# Altium PCB OpenDriver.PcbDoc (part 2 of 2)
Units mil, origin at the board's own origin, x right, y up, seen from the top; angles counter-clockwise.
Board outline 3900 x 2100 mil, 2 copper layers (Top Layer, Bottom Layer); 70 components, 50 nets, 317 pads, 234 vias.
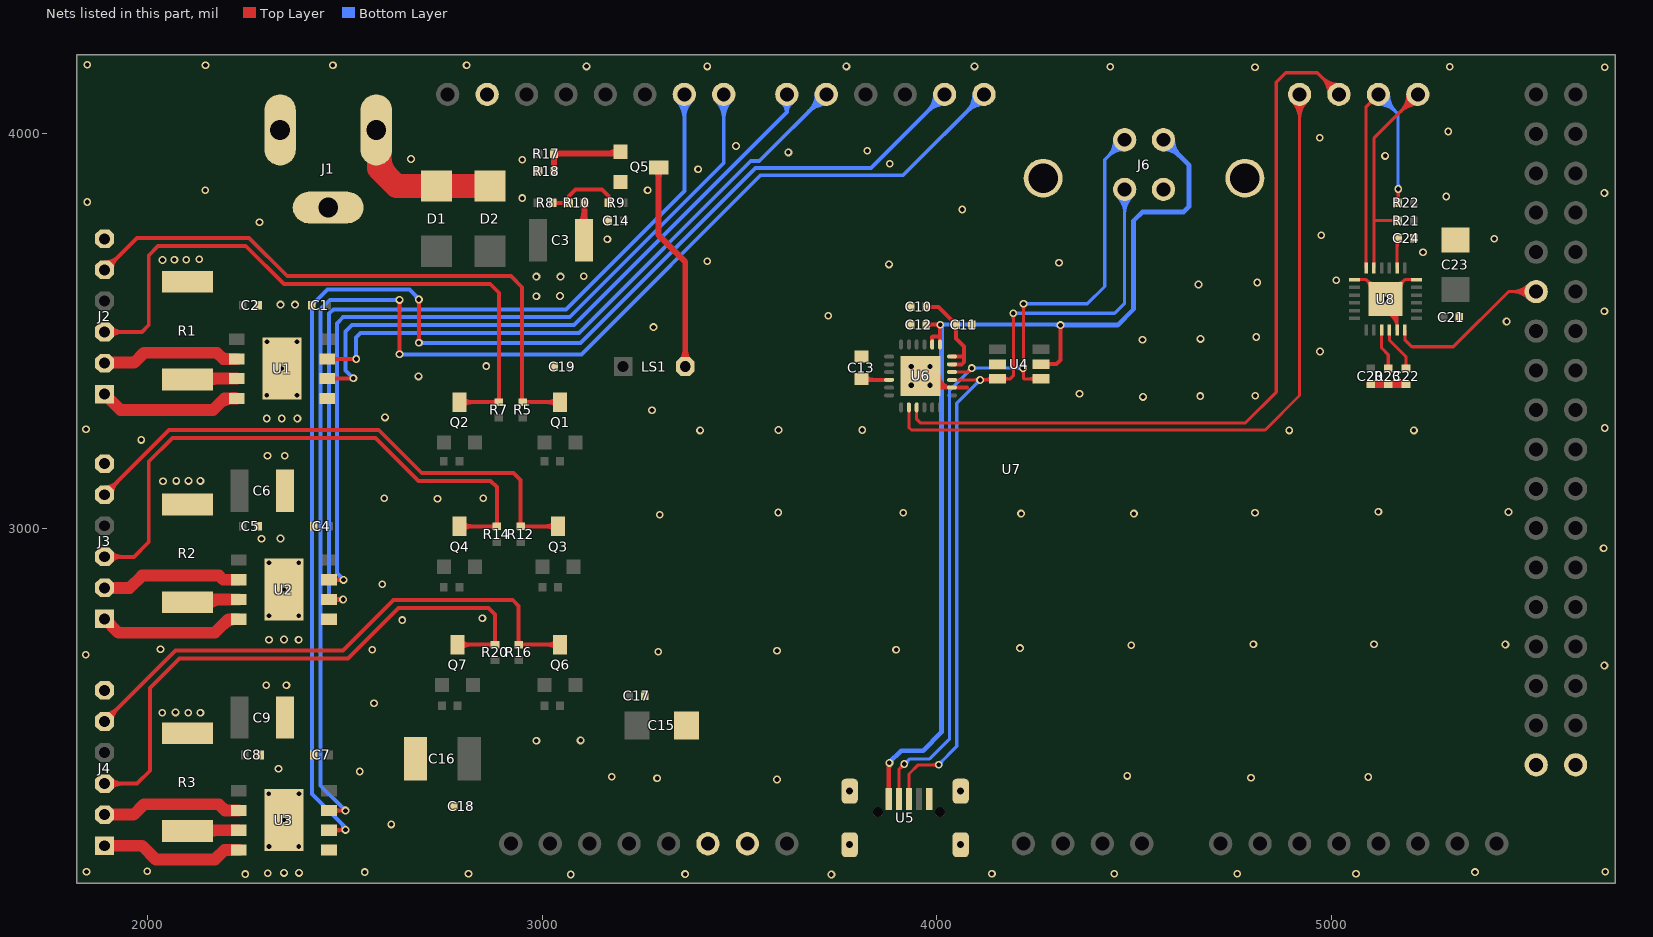
[diagram p2: the nets of this part, all layers, seen from the top]

## Via types
v1: diameter 19.68, hole 11.81, Top Layer to Bottom Layer, tented both sides, 224 vias
v2: diameter 25.98, hole 12.99, Top Layer to Bottom Layer, tented both sides, 4 vias
v3: diameter 20, hole 10, Top Layer to Bottom Layer, 3 vias
v4: diameter 31.5, hole 19.68, Top Layer to Bottom Layer, tented both sides, 3 vias

## Nets (pads, with @x,y where several pads share a name; then routed paths per layer and width w, separated by ;. In a path a pad name is that pad's centre, name@x,y a point inside that pad or via, vN(x,y) a via of type N, cw(c..) or ccw(c..) an arc to the next point about the centre after c; other vN are vias at no path point) (continued)
GND: C1.1 C2.1 C3.1 C4.1 C5.1 C6.1 C7.1 C8.1 C9.1 C10.1 C11.1 C12.1 C13.2 C14.1 C15.2 C16.2 C17.1 C18.1 C19.1 C20.1 C21.1 C22.2 C23.2 C24.2 J1.2 J1.3 J2.6 J3.6 J4.6 J6.4 J6.5 J6.6 Q5.1 R1.1 R2.1 R3.1 R10.2 R18.2 R23.1 U1.1 U1.9 U2.1 U2.9 U3.1 U3.9 U4.2 U5.5 U5.6 U5.7 U5.8 U5.9 U6.2 U6.25 U7.6 U7.7 U7.47 U7.85 U7.86 U8.1@5059.25,3630.32 U8.11 U8.18 U8.25 | length 1942.9
  Top Layer w8: U8.1@5059.25,3630.32 5088.78,3630.32 ; U8.25@5131.81,3550.41 cw(c5123.01,3506.78) U8.11@5167.52,3506.78 ; U8.25@5133.39,3558.25 cw(c5124.98,3516.56) 5167.52,3516.56 ; U8.25@5134.97,3566.1 cw(c5126.95,3526.33) 5167.52,3526.33 ; U8.25@5136.55,3573.94 cw(c5128.92,3536.1) 5167.52,3536.1 ; U8.25@5138.13,3581.78 cw(c5130.89,3545.88) U8.25@5167.52,3545.88 ; U8.11@5167.52,3502.36 5167.52,3551.57 v1(5137.99,3581.1) ; U8.18@5216.73,3630.32 5187.2,3630.32 ; 5088.78,3630.31 ccw(c5118.45,3659.98) 5128.54,3619.26 cw(c5118.45,3659.98) 5088.78,3630.31 ; 5088.78,3630.31 cw(c5059.11,3600.65) 5099.84,3590.56 ccw(c5059.11,3600.65) 5088.78,3630.31 ; 5088.78,3630.32 v1(5137.99,3581.1) ; U8.25@5098.8,3620.3 ccw(c5122.43,3643.93) 5130.46,3611.49 cw(c5122.43,3643.93) U8.25@5098.8,3620.3 ; U8.25@5098.8,3620.3 cw(c5075.17,3596.67) 5107.6,3588.63 ccw(c5075.17,3596.67) U8.25@5098.8,3620.3 ; U8.25@5128.02,3591.08 ccw(c5137.99,3601.05) U8.25@5137.99,3586.94 ; U8.25@5128.02,3591.08 cw(c5118.04,3581.1) 5132.15,3581.1 ccw(c5118.04,3581.1) U8.25@5128.02,3591.08 ; U8.25@5128.02,3591.08 ccw(c5137.99,3601.05) U8.25@5137.99,3586.94 ; v1(5137.99,3581.1) 5187.2,3630.32 ; U8.25@5137.99,3586.94 ccw(c5137.99,3601.05) U8.25@5147.97,3591.08 ; U8.25@5137.99,3586.94 ccw(c5137.99,3601.05) U8.25@5147.97,3591.08 ; U8.25@5143.83,3581.1 ccw(c5157.94,3581.1) U8.25@5147.97,3571.13 ; U8.25@5143.83,3581.1 cw(c5157.94,3581.1) U8.25@5147.97,3591.08 ; U8.25@5143.83,3581.1 ccw(c5157.94,3581.1) U8.25@5147.97,3571.13 ; U8.25@5143.83,3581.1 cw(c5157.94,3581.1) U8.25@5147.97,3591.08 ; U8.25@5147.97,3571.13 ccw(c5137.99,3561.15) 5137.99,3575.26 cw(c5137.99,3561.15) U8.25@5147.97,3571.13 ; U8.25@5177.19,3620.3 ccw(c5200.82,3596.67) 5168.38,3588.63 cw(c5200.82,3596.67) U8.25@5177.19,3620.3 ; U8.25@5177.19,3620.3 cw(c5153.56,3643.93) 5145.52,3611.49 ccw(c5153.56,3643.93) U8.25@5177.19,3620.3 ; 5187.2,3630.31 ccw(c5216.87,3600.65) 5176.15,3590.56 cw(c5216.87,3600.65) 5187.2,3630.31 ; 5187.2,3630.31 cw(c5157.54,3659.98) 5147.45,3619.26 ccw(c5157.54,3659.98) 5187.2,3630.31
  Top Layer w9: U6.25@3969.67,3386.48 ccw(c4001.06,3387.9) U6.25@4001.06,3356.47 ; U6.25@3978.66,3386.89 ccw(c4010.48,3388.32) 4010.48,3356.47 ; U6.25@3982.26,3362.02 ccw(c3995.65,3375.41) U6.25@3995.65,3356.47 ; U6.25@3987.65,3387.29 ccw(c4019.89,3388.75) 4019.89,3356.47 ; U6.25@3988.53,3356.47 U6.2@4038.72,3356.47 cw(c4038.72,3389.6) U6.25@4005.63,3388.1 ; U6.25@3988.63,3368.38 ccw(c4017.38,3397.14) 4017.38,3356.47 ; U6.25@3996.64,3387.7 ccw(c4029.31,3389.17) U6.2@4029.31,3356.47
  Top Layer w10: U6.2@4038.72,3356.47 4076.47,3356.47
  Top Layer w15: C3.1@3094.23,3771.55 ccw(c3064.15,3801.63) 3106.68,3801.63 ; C3.1@3106.68,3731.61 R10.2@3106.68,3825 ; 3106.68,3793.83 ccw(c3138.2,3793.83) C3.1@3115.91,3771.55
  Top Layer w20: C20.1@5100,3365.32 R23.1@5145,3365.32 C22.2@5190,3365.32
  other v1: 3072,2122 3733,2122 2247,2123 3362,2123 2813,2124 4140,2124 4450,2124 4762,2124 5063,2124 2304,2125 2345,2126 2383,2126 2550,2128 5365,2128 1844,2129 5695,2129 1998,2130 2307,2193 2382,2193 2617,2249 2306,2327 2383,2327 3595,2363 3291,2366 4797,2367 5094,2369 3176,2370 4483,2372 2537,2383 2331,2390 2985,2461 3097,2462 2036,2532 2102,2532 2133,2532 2070,2533 2573,2556 2300,2602 2351,2602 5693,2652 1842,2679 3294,2687 3595,2689 2569,2692 3897,2692 2032,2693 4211,2696 4493,2703 5442,2705 4803,2706 5109,2706 2307,2717 2382,2717 2345,2718 2645,2767 2848,2772 2307,2778 2382,2778 2594,2858 2307,2912 2382,2912 5691,2949 2288,2973 2336,2974 3298,3034 4214,3037 4500,3037 3915,3039 4807,3039 3598,3040 5450,3041 5120,3042 2734,3075 2599,3076 2850,3076 2038,3119 2072,3120 2103,3120 2133,3120 2303,3184 2347,3184 1983,3224 3400,3248 4894,3248 5210,3248 3599,3249 3811,3249 1843,3251 5694,3254 2301,3278 2339,3278 2379,3278 2601,3281 3278,3299 4523,3333 4668,3335 4808,3336 2301,3337 2378,3337 4362,3341 2686,3385 2858,3411 4972,3448 2302,3473 2378,3473 4522,3478 4669,3480 4810,3485 3282,3510 5445,3524 3725,3539 5693,3550 2336,3567 2373,3567 2985,3588 3045,3589 4664,3618 4813,3623 5013,3629 2985,3638 3046,3638 3105,3639 3879,3669 4310,3673 3418,3677 2037,3680 2067,3681 2097,3681 2130,3682 5233,3700 3165,3733 5414,3734 4975,3743 2283,3776 4065,3808 1846,3827 2949,3837 5292,3841 5693,3850 2145,3857 3267,3857 3395,3910 3881,3924 2949,3934 2667,3936 5137,3944 3624,3953 3824,3957 3491,3969 4971,3990 5297,4006 4807,4169 5694,4169 4440,4170 5301,4170 3112,4171 3418,4171 3771,4171 4096,4171 2146,4174 2469,4174 2808,4174 1846,4175
  other v2: 3935.38,3362.38 3982.62,3362.38 3935.38,3409.62 3982.62,3409.62
  other v3: 2345,2260 2345,2845 2340,3405
NetC10_2: C10.2 C11.2 U6.5 U6.6 | length 370.4
  Top Layer w10: C10.2@3973.68,3561 4004.32,3561 C11.2@4049.32,3516 4049.32,3480.68 4069,3461 4069,3435.21 ; U6.5@4038.72,3415.53 4063.53,3415.53 4069,3421 4069,3435.21 ; U6.6@4038.72,3435.21 4069,3435.21 ; 3985.38,3561 ccw(c3985.38,3549.31) 3977.11,3557.58 cw(c3985.38,3549.31) 3985.38,3561 ; 3985.38,3561 cw(c3985.38,3572.69) 3977.11,3564.42 ccw(c3985.38,3572.69) 3985.38,3561 ; 4049.32,3503.32 ccw(c4037.62,3503.32) 4045.89,3511.59 cw(c4037.62,3503.32) 4049.32,3503.32 ; 4049.32,3503.32 cw(c4061.01,3503.32) 4052.74,3511.59 ccw(c4061.01,3503.32) 4049.32,3503.32 ; 4039.37,3525.95 ccw(c4049.32,3535.89) 4049.32,3521.83 cw(c4049.32,3535.89) 4039.37,3525.95 ; C11.2@4041.74,3523.57 cw(c4035.16,3516.98) 4044.47,3516.98 ccw(c4035.16,3516.98) C11.2@4041.74,3523.57
NetC13_1: C13.1 U6.16 | length 144.2
  Top Layer w10: C13.1@3810.89,3376.16 U6.16@3879.28,3376.16 ; C13.1@3818.79,3370.98 cw(c3831.3,3358.47) 3831.3,3376.16 ccw(c3831.3,3358.47) C13.1@3818.79,3370.98 ; C13.1@3818.79,3385.12 ccw(c3840.42,3406.75) 3840.42,3376.16 cw(c3840.42,3406.75) C13.1@3818.79,3385.12
NetC22_1: C22.1 U8.10 | length 159.5
  Top Layer w8: U8.10@5147.83,3502.36 5147.83,3477.17 5190,3435 C22.1@5190,3404.68 ; 5190,3418.79 ccw(c5204.1,3418.79) 5194.13,3408.82 cw(c5204.1,3418.79) 5190,3418.79 ; 5190,3418.79 cw(c5175.9,3418.79) 5185.87,3408.82 ccw(c5175.9,3418.79) 5190,3418.79
NetC24_1: C24.1 U8.20 | length 109.5
  Top Layer w8: U8.20@5167.52,3659.84 C24.1@5167.52,3732.2 ; 5167.52,3713.16 cw(c5191.17,3713.16) 5174.45,3729.88 ccw(c5191.17,3713.16) 5167.52,3713.16
NetD1_1: D1.1 D2.1 J1.1 | length 476.1
  Top Layer w60: J1.1@2579.09,4010 2585.05,4004.05 2585.05,3912.95 2630.32,3867.68 D1.1@2732,3867.68 D2.1@2867,3867.68 ; J1.1@2588.89,3957.98 ccw(c2664.02,3942.47) 2609.77,3888.23
NetJ2_1: J2.1 U1.8 | length 545.8
  Top Layer w30: J2.1@1890,3340 1930,3300 2165,3300 2194.22,3329.22 U1.8@2225.76,3329.22 ; 2177.22,3312.22 cw(c2220.24,3269.2) 2220.24,3330.04 ccw(c2220.24,3269.2) 2177.22,3312.22 ; 2181.2,3316.2 cw(c2215.25,3282.16) 2220.33,3330.04 ccw(c2215.25,3282.16) 2181.2,3316.2
NetJ2_2: J2.2 U1.6 | length 392.6
  Top Layer w30: J2.2@1890,3418.74 1891.26,3420 1965,3420 1990,3445 2175,3445 2190.78,3429.22 U1.6@2225.76,3429.22 ; J2.2@1896.1,3412.64 cw(c1913.86,3394.88) 1913.86,3420 ccw(c1913.86,3394.88) J2.2@1896.1,3412.64
NetJ2_3: J2.3 Q2.2 R7.2 | length 1934.2
  Top Layer w10: J2.3@1890,3497.48 1984.48,3497.48 2002,3515 2002,3692 2026,3716 2248,3716 2345,3619 2868,3619 2890,3597 R7.2@2890,3319.68 Q2.2@2790,3319.68 ; 1934.96,3497.48 ccw(c1934.96,3452.52) 1903.17,3484.31 cw(c1934.96,3452.52) 1934.96,3497.48 ; 1934.96,3497.48 cw(c1934.96,3542.44) 1903.17,3510.65 ccw(c1934.96,3542.44) 1934.96,3497.48 ; 2821.41,3319.68 ccw(c2821.41,3288.27) 2799.2,3310.48 cw(c2821.41,3288.27) 2821.41,3319.68 ; 2821.41,3319.68 cw(c2821.41,3351.1) 2799.2,3328.89 ccw(c2821.41,3351.1) 2821.41,3319.68 ; 2877.32,3319.68 ccw(c2877.32,3331.38) 2885.59,3323.11 cw(c2877.32,3331.38) 2877.32,3319.68 ; 2877.32,3319.68 cw(c2877.32,3307.99) 2885.59,3316.26 ccw(c2877.32,3307.99) 2877.32,3319.68 ; 2890,3331.38 ccw(c2901.69,3331.38) 2893.42,3323.11 cw(c2901.69,3331.38) 2890,3331.38 ; 2890,3331.38 cw(c2878.31,3331.38) 2886.58,3323.11 ccw(c2878.31,3331.38) 2890,3331.38
NetJ2_5: J2.5 Q1.2 R5.2 | length 1844.5
  Top Layer w10: J2.5@1890,3654.96 1890.96,3654.96 1972,3736 2256.28,3736 2353.28,3639 2921,3639 2949,3611 2949,3320.68 R5.2@2950,3319.68 Q1.2@3045,3319.68 ; 2962.68,3319.68 ccw(c2962.68,3307.99) 2954.41,3316.26 cw(c2962.68,3307.99) 2962.68,3319.68 ; 2962.68,3319.68 cw(c2962.68,3331.38) 2954.41,3323.11 ccw(c2962.68,3331.38) 2962.68,3319.68 ; 3013.59,3319.68 ccw(c3013.59,3351.1) 3035.8,3328.89 cw(c3013.59,3351.1) 3013.59,3319.68 ; 3013.59,3319.68 cw(c3013.59,3288.27) 3035.8,3310.48 ccw(c3013.59,3288.27) 3013.59,3319.68 ; J2.5@1890,3673.58 ccw(c1890,3720.86) 1923.43,3687.43 cw(c1890,3720.86) J2.5@1890,3673.58 ; J2.5@1908.62,3654.96 cw(c1951.26,3654.96) 1921.11,3685.11 ccw(c1951.26,3654.96) J2.5@1908.62,3654.96 ; R5.2@2945.59,3323.11 ccw(c2937.36,3331.34) 2949,3331.34 cw(c2937.36,3331.34) R5.2@2945.59,3323.11 ; 2949,3331.41 ccw(c2960.74,3331.41) 2952.44,3323.11 cw(c2960.74,3331.41) 2949,3331.41
NetJ3_1: J3.1 U2.8 | length 515.4
  Top Layer w30: J3.1@1890,2770 1925,2735 2170,2735 2204.22,2769.22 U2.8@2230.76,2769.22 ; 2190.76,2755.76 cw(c2225.24,2721.27) 2225.24,2770.04 ccw(c2225.24,2721.27) 2190.76,2755.76 ; 2193.7,2758.7 cw(c2221.52,2730.89) 2225.32,2770.04 ccw(c2221.52,2730.89) 2193.7,2758.7
NetJ3_2: J3.2 U2.6 | length 358.2
  Top Layer w30: J3.2@1890,2848.74 1953.74,2848.74 1985,2880 2180,2880 2190.78,2869.22 U2.6@2230.76,2869.22
NetJ3_3: J3.3 Q4.2 R14.2 | length 1798.9
  Top Layer w10: J3.3@1890,2927.48 1964.48,2927.48 2002,2965 2002,3169 2062,3229 2577,3229 2686,3120 2869,3120 2885,3104 R14.2@2885,3004.68 Q4.2@2790,3004.68 ; 1934.96,2927.48 ccw(c1934.96,2882.52) 1903.17,2914.31 cw(c1934.96,2882.52) 1934.96,2927.48 ; 1934.96,2927.48 cw(c1934.96,2972.44) 1903.17,2940.65 ccw(c1934.96,2972.44) 1934.96,2927.48 ; 2821.41,3004.68 ccw(c2821.41,2973.27) 2799.2,2995.48 cw(c2821.41,2973.27) 2821.41,3004.68 ; 2821.41,3004.68 cw(c2821.41,3036.1) 2799.2,3013.89 ccw(c2821.41,3036.1) 2821.41,3004.68 ; 2872.32,3004.68 ccw(c2872.32,3016.38) 2880.59,3008.11 cw(c2872.32,3016.38) 2872.32,3004.68 ; 2872.32,3004.68 cw(c2872.32,2992.99) 2880.59,3001.26 ccw(c2872.32,2992.99) 2872.32,3004.68 ; 2885,3016.38 ccw(c2896.69,3016.38) 2888.42,3008.11 cw(c2896.69,3016.38) 2885,3016.38 ; 2885,3016.38 cw(c2873.31,3016.38) 2881.58,3008.11 ccw(c2873.31,3016.38) 2885,3016.38
NetJ3_5: J3.5 Q3.2 R12.2 | length 1701.4
  Top Layer w10: J3.5@1890,3084.96 1890,3085.28 2053.72,3249 2585.28,3249 2694.28,3140 2927,3140 2945,3122 R12.2@2945,3004.68 Q3.2@3040,3004.68 ; 2945,3016.38 ccw(c2956.69,3016.38) 2948.42,3008.11 cw(c2956.69,3016.38) 2945,3016.38 ; 2945,3016.38 cw(c2933.31,3016.38) 2941.58,3008.11 ccw(c2933.31,3016.38) 2945,3016.38 ; 2957.68,3004.68 ccw(c2957.68,2992.99) 2949.41,3001.26 cw(c2957.68,2992.99) 2957.68,3004.68 ; 2957.68,3004.68 cw(c2957.68,3016.38) 2949.41,3008.11 ccw(c2957.68,3016.38) 2957.68,3004.68 ; 3008.59,3004.68 ccw(c3008.59,3036.1) 3030.8,3013.89 cw(c3008.59,3036.1) 3008.59,3004.68 ; 3008.59,3004.68 cw(c3008.59,2973.27) 3030.8,2995.48 ccw(c3008.59,2973.27) 3008.59,3004.68 ; J3.5@1890,3103.58 ccw(c1890,3147.76) 1921.24,3116.52 cw(c1890,3147.76) J3.5@1890,3103.58 ; J3.5@1908.62,3084.96 cw(c1954.36,3084.96) 1922.02,3117.3 ccw(c1954.36,3084.96) J3.5@1908.62,3084.96
NetJ4_1: J4.1 U3.8 | length 365.3
  Top Layer w30: J4.1@1890,2195 1985,2195 2020,2160 2170,2160 2194.22,2184.22 U3.8@2230.76,2184.22
NetJ4_2: J4.2 U3.6 | length 358.2
  Top Layer w30: J4.2@1890,2273.74 1963.74,2273.74 1990,2300 2180,2300 2195.78,2284.22 U3.6@2230.76,2284.22
NetJ4_3: J4.3 Q7.2 R20.2 | length 1789.3
  Top Layer w10: J4.3@1890,2352.48 1972.48,2352.48 2005,2385 2005,2595 2080,2670 2507,2670 2635,2798 2863,2798 2880,2781 R20.2@2880,2704.68 Q7.2@2785,2704.68 ; 1934.96,2352.48 ccw(c1934.96,2307.52) 1903.17,2339.31 cw(c1934.96,2307.52) 1934.96,2352.48 ; 1934.96,2352.48 cw(c1934.96,2397.44) 1903.17,2365.65 ccw(c1934.96,2397.44) 1934.96,2352.48 ; 2816.41,2704.68 ccw(c2816.41,2673.27) 2794.2,2695.48 cw(c2816.41,2673.27) 2816.41,2704.68 ; 2816.41,2704.68 cw(c2816.41,2736.1) 2794.2,2713.89 ccw(c2816.41,2736.1) 2816.41,2704.68 ; 2867.32,2704.68 ccw(c2867.32,2716.38) 2875.59,2708.11 cw(c2867.32,2716.38) 2867.32,2704.68 ; 2867.32,2704.68 cw(c2867.32,2692.99) 2875.59,2701.26 ccw(c2867.32,2692.99) 2867.32,2704.68 ; 2880,2716.38 ccw(c2891.69,2716.38) 2883.42,2708.11 cw(c2891.69,2716.38) 2880,2716.38 ; 2880,2716.38 cw(c2868.31,2716.38) 2876.58,2708.11 ccw(c2868.31,2716.38) 2880,2716.38
NetJ4_5: J4.5 Q6.2 R16.2 | length 1700.5
  Top Layer w10: J4.5@1890,2509.96 2070.04,2690 2495,2690 2623,2818 2925,2818 2940,2803 R16.2@2940,2704.68 Q6.2@3045,2704.68 ; 1921.79,2541.75 ccw(c1953.58,2509.96) 1908.62,2509.96 cw(c1953.58,2509.96) 1921.79,2541.75 ; 1921.79,2541.75 cw(c1890,2573.54) 1890,2528.58 ccw(c1890,2573.54) 1921.79,2541.75 ; 2940,2716.38 ccw(c2951.69,2716.38) 2943.42,2708.11 cw(c2951.69,2716.38) 2940,2716.38 ; 2940,2716.38 cw(c2928.31,2716.38) 2936.58,2708.11 ccw(c2928.31,2716.38) 2940,2716.38 ; 2952.68,2704.68 ccw(c2952.68,2692.99) 2944.41,2701.26 cw(c2952.68,2692.99) 2952.68,2704.68 ; 2952.68,2704.68 cw(c2952.68,2716.38) 2944.41,2708.11 ccw(c2952.68,2716.38) 2952.68,2704.68 ; 3013.59,2704.68 ccw(c3013.59,2736.1) 3035.8,2713.89 cw(c3013.59,2736.1) 3013.59,2704.68 ; 3013.59,2704.68 cw(c3013.59,2673.27) 3035.8,2695.48 ccw(c3013.59,2673.27) 3013.59,2704.68
NetLS1_2: LS1.2 Q5.3 | length 695.1
  Top Layer w15: Q5.3@3287.57,3907.57 cw(c3269.62,3889.62) 3295,3889.62 cw(c3320.38,3889.62) Q5.3@3302.43,3907.57 ; Q5.3@3295,3915 3295,3743 3362.48,3675.52 LS1.2@3362.48,3410 ; 3362.48,3448.92 ccw(c3401.4,3448.92) 3373.88,3421.4 cw(c3401.4,3448.92) 3362.48,3448.92 ; 3362.48,3448.92 cw(c3323.56,3448.92) 3351.08,3421.4 ccw(c3323.56,3448.92) 3362.48,3448.92
NetQ5_2: Q5.2 R17.1 R18.1 | length 241.1
  Top Layer w15: R18.1@3029.68,3905 R17.1@3029.68,3950 Q5.2@3194.17,3950 ; 3162.62,3950 ccw(c3162.62,3990.3) Q5.2@3191.11,3961.8
NetR1_2: R1.2 U1.7 | length 186.4
  Top Layer w30: R1.2@2100,3376.97 2102.25,3379.22 U1.7@2225.76,3379.22 ; R1.2@2146.28,3368.09 cw(c2173.15,3341.22) 2173.15,3379.22 ccw(c2173.15,3341.22) R1.2@2146.28,3368.09
NetR2_2: R2.2 U2.7 | length 215
  Top Layer w30: R2.2@2102.25,2819.22 U2.7@2230.76,2819.22 ; R2.2@2146.28,2803.09 cw(c2185.22,2764.15) 2185.22,2819.22 ccw(c2185.22,2764.15) R2.2@2146.28,2803.09
NetR3_2: R3.2 U3.7 | length 188.2
  Top Layer w30: R3.2@2102.25,2234.22 U3.7@2230.76,2234.22 ; R3.2@2146.28,2223.09 cw(c2173.15,2196.22) 2173.15,2234.22 ccw(c2173.15,2196.22) R3.2@2146.28,2223.09
NetR8_2: R8.2 R9.1 R10.1 | length 336.2
  Top Layer w10: R8.2@3026.68,3825 R10.1@3067.32,3825 3067.32,3842.32 3084,3859 3151,3859 3167.32,3842.68 R9.1@3167.32,3825 ; 3038.38,3825 ccw(c3038.38,3813.31) 3030.11,3821.58 cw(c3038.38,3813.31) 3038.38,3825 ; 3038.38,3825 cw(c3038.38,3836.69) 3030.11,3828.42 ccw(c3038.38,3836.69) 3038.38,3825 ; 3055.62,3825 ccw(c3055.62,3836.69) 3063.89,3828.42 cw(c3055.62,3836.69) 3055.62,3825 ; 3055.62,3825 cw(c3055.62,3813.31) 3063.89,3821.58 ccw(c3055.62,3813.31) 3055.62,3825 ; 3067.32,3837.68 ccw(c3079.01,3837.68) 3070.74,3829.41 cw(c3079.01,3837.68) 3067.32,3837.68 ; 3067.32,3837.68 cw(c3055.62,3837.68) 3063.89,3829.41 ccw(c3055.62,3837.68) 3067.32,3837.68 ; 3167.32,3837.68 ccw(c3179.01,3837.68) 3170.74,3829.41 cw(c3179.01,3837.68) 3167.32,3837.68 ; 3167.32,3837.68 cw(c3155.62,3837.68) 3163.89,3829.41 ccw(c3155.62,3837.68) 3167.32,3837.68
NetR21_2: R21.2 U7.25 U8.23 | length 919.1
  Top Layer w8: U8.23@5108.46,3659.84 5108.46,3780 ; R21.2@5170.31,3780 5108.46,3780 ; U7.25@5220,4100 5108.46,3988.46 5108.46,3780 ; 5156.21,3780 ccw(c5156.21,3794.11) 5166.18,3784.13 cw(c5156.21,3794.11) 5156.21,3780 ; 5156.21,3780 cw(c5156.21,3765.89) 5166.18,3775.87 ccw(c5156.21,3765.89) 5156.21,3780 ; 5176.42,4056.42 ccw(c5132.84,4100) 5194.47,4100 cw(c5132.84,4100) 5176.42,4056.42 ; 5176.42,4056.42 cw(c5220,4012.84) 5220,4074.47 ccw(c5220,4012.84) 5176.42,4056.42 ; 5190.08,4070.08 ccw(c5160.16,4100) 5202.47,4100 cw(c5160.16,4100) 5190.08,4070.08 ; 5190.08,4070.08 cw(c5220,4040.16) 5220,4082.47 ccw(c5220,4040.16) 5190.08,4070.08
NetR22_2: R22.2 U7.26 U8.24 | length 1208
  Top Layer w8: U8.24@5088.78,3659.84 5088.78,4068.78 U7.26@5120,4100 ; R22.2@5170.31,3825 v1@5170.31,3859.68 ; 5170.32,3840.09 ccw(c5184.42,3840.09) 5174.45,3830.12 cw(c5184.42,3840.09) 5170.32,3840.09 ; 5170.31,3840.09 cw(c5156.21,3840.09) 5166.18,3830.12 ccw(c5156.21,3840.09) 5170.31,3840.09 ; v1@5165.87,3855.87 cw(c5155.13,3845.13) 5170.32,3845.13 ccw(c5155.13,3845.13) v1@5165.87,3855.87 ; 5170.32,3846.66 cw(c5183.34,3846.66) 5174.13,3855.87 ccw(c5183.34,3846.66) 5170.32,3846.66
  Bottom Layer w8: U7.26@5120,4100 5170,4050 v1(5170,3860) ; 5149.92,4070.08 ccw(c5120,4040.16) 5120,4082.47 cw(c5120,4040.16) 5149.92,4070.08 ; 5149.92,4070.08 cw(c5179.84,4100) 5137.53,4100 ccw(c5179.84,4100) 5149.92,4070.08 ; 5163.58,4056.42 ccw(c5120,4012.84) 5120,4074.47 cw(c5120,4012.84) 5163.58,4056.42 ; 5163.58,4056.42 cw(c5207.16,4100) 5145.53,4100 ccw(c5207.16,4100) 5163.58,4056.42 ; 5170,3874.11 ccw(c5184.1,3874.11) 5174.13,3864.13 cw(c5184.1,3874.11) 5170,3874.11 ; 5170,3874.11 cw(c5155.9,3874.11) 5165.87,3864.13 ccw(c5155.9,3874.11) 5170,3874.11
NetR23_2: R23.2 U8.9 | length 149
  Top Layer w8: U8.9@5128.15,3502.36 5128.15,3456.85 5145,3440 R23.2@5145,3404.68 ; 5145,3418.79 ccw(c5159.1,3418.79) 5149.13,3408.82 cw(c5159.1,3418.79) 5145,3418.79 ; 5145,3418.79 cw(c5130.9,3418.79) 5140.87,3408.82 ccw(c5130.9,3418.79) 5145,3418.79
NetU1_2: U1.2 U7.40 | length 1829.6
  Top Layer w10: U1.2@2454.1,3379.22 v1@2520.22,3379.22 ; 2481.76,3379.22 ccw(c2481.76,3357.07) 2466.1,3372.73 cw(c2481.76,3357.07) 2481.76,3379.22 ; 2481.76,3379.22 cw(c2481.76,3401.36) 2466.1,3385.7 ccw(c2481.76,3401.36) 2481.76,3379.22 ; 2507.42,3379.22 ccw(c2507.42,3393.58) 2517.58,3383.42 cw(c2507.42,3393.58) 2507.42,3379.22
  Bottom Layer w10: v1(2521,3380) 2501,3400 2501,3499 2517,3515 3080,3515 3620,4055 ; U7.40@3606.71,4079.39 cw(c3590.99,4055) 3620,4055 ; U7.40@3609.73,4089.73 cw(c3584.93,4064.93) 3620,4064.93 cw(c3655.07,4064.93) U7.40@3630.27,4089.73 ; U7.40@3620,4100 3620,4055 ; U7.40@3633.29,4079.39 ccw(c3649.01,4055) 3620,4055 ; 2512.73,3388.27 ccw(c2521,3396.53) 2521,3384.84 cw(c2521,3396.53) 2512.73,3388.27 ; 2512.73,3388.27 cw(c2504.47,3380) 2516.16,3380 ccw(c2504.47,3380) 2512.73,3388.27
NetU1_3: U1.3 U7.39 | length 2015.1
  Top Layer w10: U1.3@2454.1,3429.22 v1@2527.78,3429.22 ; 2481.76,3429.22 ccw(c2481.76,3407.07) 2466.1,3422.73 cw(c2481.76,3407.07) 2481.76,3429.22 ; 2481.76,3429.22 cw(c2481.76,3451.36) 2466.1,3435.7 ccw(c2481.76,3451.36) 2481.76,3429.22 ; 2515.79,3429.22 cw(c2515.79,3416.79) 2524.58,3425.58 ccw(c2515.79,3416.79) 2515.79,3429.22 ; 2516.83,3429.22 ccw(c2516.83,3440.17) 2524.58,3432.42 cw(c2516.83,3440.17) 2516.83,3429.22
  Bottom Layer w10: v1(2528,3429) 2528,3484 2539,3495 3092.46,3495 3528.46,3931 3550,3931 3719,4100 U7.39@3720,4100 ; 2528,3440.69 ccw(c2539.69,3440.69) 2531.42,3432.42 cw(c2539.69,3440.69) 2528,3440.69 ; 2528,3440.69 cw(c2516.31,3440.69) 2524.58,3432.42 ccw(c2516.31,3440.69) 2528,3440.69 ; 3676.42,4057.42 cw(c3720,4013.84) 3720,4075.47 ccw(c3720,4013.84) 3676.42,4057.42 ; 3678.84,4059.84 ccw(c3638.67,4100) 3695.47,4100 cw(c3638.67,4100) 3678.84,4059.84 ; 3693.49,4074.49 cw(c3720,4047.99) 3720,4085.47 ccw(c3720,4047.99) 3693.49,4074.49 ; 3695.91,4076.91 ccw(c3672.81,4100) 3705.47,4100 cw(c3672.81,4100) 3695.91,4076.91
NetU2_2: U2.2 U7.42 | length 2504
  Top Layer w10: U2.2@2459.1,2819.22 v1(2494.78,2819.22) ; 2483.09,2819.22 ccw(c2483.09,2830.91) 2491.36,2822.64 cw(c2483.09,2830.91) 2483.09,2819.22 ; 2483.09,2819.22 cw(c2483.09,2807.53) 2491.36,2815.79 ccw(c2483.09,2807.53) 2483.09,2819.22 ; v1@2486.76,2819.22 ccw(c2486.76,2797.07) 2471.1,2812.73 cw(c2486.76,2797.07) v1@2486.76,2819.22 ; v1@2486.76,2819.22 cw(c2486.76,2841.36) 2471.1,2825.7 ccw(c2486.76,2841.36) v1@2486.76,2819.22
  Bottom Layer w10: v1(2494.78,2819.22) 2469.78,2819.22 2459,2830 2459,3480 2459,3544 2470,3555 3060,3555 3360,3855 U7.42@3360,4100 ; 2483.09,2819.22 ccw(c2483.09,2830.91) 2491.36,2822.64 cw(c2483.09,2830.91) 2483.09,2819.22 ; 2483.09,2819.22 cw(c2483.09,2807.53) 2491.36,2815.79 ccw(c2483.09,2807.53) 2483.09,2819.22 ; 3360,4040.79 ccw(c3300.79,4040.79) 3342.66,4082.66 cw(c3300.79,4040.79) 3360,4040.79 ; 3360,4040.79 cw(c3419.21,4040.79) 3377.34,4082.66 ccw(c3419.21,4040.79) 3360,4040.79 ; 3360,4064.93 ccw(c3324.93,4064.93) 3349.73,4089.73 cw(c3324.93,4064.93) 3360,4064.93 ; 3360,4064.93 cw(c3395.07,4064.93) 3370.27,4089.73 ccw(c3395.07,4064.93) 3360,4064.93
NetU2_3: U2.3 U7.41 | length 2458.5
  Top Layer w10: U2.3@2460.32,2868 U2.3@2459.1,2869.22 v1@2496,2869.22 ; v1@2486.76,2869.22 ccw(c2486.76,2847.07) 2471.1,2862.73 cw(c2486.76,2847.07) v1@2486.76,2869.22 ; v1@2486.76,2869.22 cw(c2486.76,2891.36) 2471.1,2875.7 ccw(c2486.76,2891.36) v1@2486.76,2869.22 ; 2483.79,2869.22 cw(c2483.79,2856.79) 2492.58,2865.58 ccw(c2483.79,2856.79) 2483.79,2869.22 ; 2484.83,2869.22 ccw(c2484.83,2880.17) 2492.58,2872.42 cw(c2484.83,2880.17) 2484.83,2869.22
  Bottom Layer w10: v1(2496,2869) 2479,2886 2479,3519 2495,3535 3069,3535 3460,3926 U7.41@3460,4100 ; 2487.73,2877.27 ccw(c2496,2885.53) 2496,2873.84 cw(c2496,2885.53) 2487.73,2877.27 ; 2487.73,2877.27 cw(c2479.47,2869) 2491.16,2869 ccw(c2479.47,2869) 2487.73,2877.27 ; 3460,4040.79 ccw(c3400.79,4040.79) 3442.66,4082.66 cw(c3400.79,4040.79) 3460,4040.79 ; 3460,4040.79 cw(c3519.21,4040.79) 3477.34,4082.66 ccw(c3519.21,4040.79) 3460,4040.79 ; 3460,4064.93 ccw(c3424.93,4064.93) 3449.73,4089.73 cw(c3424.93,4064.93) 3460,4064.93 ; 3460,4064.93 cw(c3495.07,4064.93) 3470.27,4089.73 ccw(c3495.07,4064.93) 3460,4064.93
NetU3_2: U3.2 U7.36 | length 3697.1
  Top Layer w10: U3.2@2459.1,2234.22 v1@2500.22,2234.22 ; U3.2@2471.1,2227.73 cw(c2486.76,2212.07) 2486.76,2234.22 cw(c2486.76,2256.36) U3.2@2471.1,2240.7 ; 2487.42,2234.22 ccw(c2487.42,2248.58) v1@2497.58,2238.42 ; v1@2683.58,3473.42 ccw(c2675.31,3481.69) 2687,3481.69 ccw(c2698.69,3481.69) v1@2690.42,3473.42 ; v1@2683.58,3576.58 cw(c2675.31,3568.31) 2687,3568.31 cw(c2698.69,3568.31) v1@2690.42,3576.58 ; v1(2687,3470) v1(2687,3580)
  Bottom Layer w10: 2488.28,2254.03 cw(c2469.25,2235) v1@2496.16,2235 ; v1(2501,2235) 2501,2241.3 2416,2326.3 2416,3566 2455,3605 2663,3605 v1@2687,3581 ; 2678.03,3589.97 cw(c2668.05,3580) v1@2682.16,3580 ; 2680.44,3587.56 ccw(c2687,3594.12) v1@2687,3584.84 ; v1(2687,3470) 3097,3470 3540,3913 3833,3913 U7.36@4020,4100 ; v1@2690.42,3466.58 cw(c2698.69,3458.31) 2698.69,3470 cw(c2698.69,3481.69) v1@2690.42,3473.42 ; U7.36@3995.47,4100 cw(c3936.26,4100) 3978.13,4058.13 cw(c4020,4016.26) U7.36@4020,4075.47 ; U7.36@4005.47,4100 cw(c3970.4,4100) 3995.2,4075.2 cw(c4020,4050.4) U7.36@4020,4085.47
NetU3_3: U3.3 U7.35 | length 3736.1
  Top Layer w10: U3.3@2459.1,2284.22 v1@2500.78,2284.22 ; U3.3@2471.1,2277.73 cw(c2486.76,2262.07) 2486.76,2284.22 cw(c2486.76,2306.36) U3.3@2471.1,2290.7 ; 2488.79,2284.22 cw(c2488.79,2271.79) v1@2497.58,2280.58 ; 2489.83,2284.22 ccw(c2489.83,2295.17) v1@2497.58,2287.42 ; v1@2634.58,3444.42 ccw(c2626.31,3452.69) 2638,3452.69 ccw(c2649.69,3452.69) v1@2641.42,3444.42 ; v1@2634.58,3575.58 cw(c2626.31,3567.31) 2638,3567.31 cw(c2649.69,3567.31) v1@2641.42,3575.58 ; v1(2638,3441) v1(2638,3579)
  Top Layer w20: U3.3@2459.1,2284.22 U3.3@2460.32,2283
  Bottom Layer w10: v1@2496.16,2284 ccw(c2484.47,2284) 2492.73,2292.27 ccw(c2501,2300.53) v1@2501,2288.84 ; v1(2501,2284) 2438,2347 2438,3556 2461,3579 v1(2638,3579) ; v1@2634.58,3575.58 ccw(c2626.31,3567.31) 2626.31,3579 ccw(c2626.31,3590.69) v1@2634.58,3582.42 ; v1@2639,3441 3099,3441 3553,3895 3915,3895 U7.35@4120,4100 ; v1@2641.42,3437.58 cw(c2649.69,3429.31) 2649.69,3441 cw(c2649.69,3452.69) v1@2641.42,3444.42 ; U7.35@4095.47,4100 cw(c4036.26,4100) 4078.13,4058.13 cw(c4120,4016.26) U7.35@4120,4075.47 ; U7.35@4105.47,4100 cw(c4070.4,4100) 4095.2,4075.2 cw(c4120,4050.4) U7.35@4120,4085.47
NetU6_20: U6.20 U7.28 | length 2007.1
  Top Layer w8: U6.20@3929.47,3306.28 3929.47,3255.53 3936,3249 4832.63,3249 4920,3336.37 U7.28@4920,4100 ; U7.28@4901.95,4081.95 cw(c4858.37,4038.37) 4920,4038.37 cw(c4981.63,4038.37) U7.28@4938.05,4081.95 ; U7.28@4907.61,4087.61 cw(c4877.68,4057.68) 4920,4057.68 cw(c4962.32,4057.68) U7.28@4932.39,4087.61
NetU6_21: U6.21 U7.27 | length 2119.2
  Top Layer w8: U6.21@3949.16,3306.28 3949.16,3275.84 3958,3267 4783,3267 4861,3345 4861,4131 4885,4155 4965,4155 U7.27@5020,4100 ; U7.27@4994.47,4100 ccw(c4932.84,4100) 4976.42,4143.58 ccw(c5020,4187.16) U7.27@5020,4125.53 ; U7.27@5002.47,4100 ccw(c4960.16,4100) 4990.08,4129.92 ccw(c5020,4159.84) U7.27@5020,4117.53
NetU7_61: U7.61 U8.12 | length 749.3
  Top Layer w8: U8.12@5187.2,3502.36 5187.2,3477.8 5205,3460 5310,3460 5450,3600 U7.61@5520,3600 ; 5458.37,3600 ccw(c5458.37,3661.63) 5501.95,3618.05 cw(c5458.37,3661.63) 5458.37,3600 ; 5458.37,3600 cw(c5458.37,3538.37) 5501.95,3581.95 ccw(c5458.37,3538.37) 5458.37,3600 ; 5477.68,3600 ccw(c5477.68,3642.32) 5507.61,3612.39 cw(c5477.68,3642.32) 5477.68,3600 ; 5477.68,3600 cw(c5477.68,3557.68) 5507.61,3587.61 ccw(c5477.68,3557.68) 5477.68,3600
USB_D+: J6.3 U4.3 U5.3 U6.3 | length 2514.7
  Top Layer w8: U5.3@3926.97,2336.01 ccw(c3920.35,2342.62) 3929.7,2342.62 ccw(c3939.06,2342.62) U5.3@3932.44,2336.01 ; U5.3@3929.7,2313.58 3929.7,2376.7 3953,2400 v1(4005,2400) ; v1@4000.87,2395.87 ccw(c3990.89,2385.89) 3990.89,2400 ccw(c3990.89,2414.11) v1@4000.87,2404.13 ; U6.3@4038.72,3376.16 U4.3@4151.44,3376.16 ; 4095.51,3376.16 cw(c4095.51,3361.51) v1@4105.87,3371.87 ; 4096.28,3376.16 ccw(c4096.28,3389.72) v1@4105.87,3380.13 ; v1@4114.13,3371.87 cw(c4124.49,3361.51) 4124.49,3376.16 ; v1@4114.13,3380.13 ccw(c4123.72,3389.72) 4123.72,3376.16 ; U4.3@4153.88,3378.6 4186.6,3378.6 4194.3,3386.3 v1@4194.3,3545 ; v1@4189.87,3540.87 cw(c4179.18,3530.18) 4194.3,3530.18 ; 4194.3,3531.61 cw(c4207.39,3531.61) v1@4198.13,3540.87 ; 4182.58,3378.6 ccw(c4182.58,3359.74) 4169.25,3373.08 cw(c4182.58,3359.74) 4182.58,3378.6 ; 4182.58,3378.6 cw(c4182.58,3397.46) 4169.25,3384.12 ccw(c4182.58,3397.46) 4182.58,3378.6 ; v1@4119.29,3376.16 ccw(c4119.29,3403.35) 4138.52,3384.12 cw(c4119.29,3403.35) v1@4119.29,3376.16 ; 4131.07,3376.16 cw(c4131.07,3365.63) 4138.52,3373.08 ccw(c4131.07,3365.63) 4131.07,3376.16
  Bottom Layer w8: v1@4005,2401 4051,2447 4051,3317 v1(4110,3376) ; v1@4005,2405.84 ccw(c4005,2417.53) 4013.27,2409.27 ; v1@4010.84,2400 cw(c4027.36,2400) 4015.68,2411.68 ; v1@4104.16,3376 cw(c4090.05,3376) 4100.03,3366.03 cw(c4110,3356.05) v1@4110,3370.16 ; v1(4194,3545) 4451,3545 4476.57,3570.57 J6.3@4476.57,3859.02 ; v1@4198.13,3540.87 cw(c4208.1,3530.89) 4208.1,3545 cw(c4208.1,3559.11) v1@4198.13,3549.13 ; J6.3@4458.52,3840.97 cw(c4414.95,3797.39) 4476.57,3797.39 cw(c4538.2,3797.39) J6.3@4494.63,3840.97 ; J6.3@4464.18,3846.62 cw(c4434.26,3816.7) 4476.57,3816.7 cw(c4518.89,3816.7) J6.3@4488.97,3846.62
USB_D-: J6.2 U4.4 U5.2 U6.4 | length 2730.1
  Top Layer w8: U5.2@3901.37,2336.01 ccw(c3894.76,2342.62) 3904.11,2342.62 ccw(c3913.47,2342.62) U5.2@3906.85,2336.01 ; U5.2@3904.11,2313.58 3904.11,2388.11 v1(3918,2402) ; v1@3912.16,2402 cw(c3898.05,2402) 3908.03,2392.03 cw(c3918,2382.05) v1@3918,2396.16 ; U6.4@4038.72,3395.84 4078.84,3395.84 v1(4089,3406) ; v1@4214.87,3401.87 cw(c4202.76,3389.76) 4219.89,3389.76 ; v1@4214.87,3410.13 ccw(c4202.76,3422.24) 4219.89,3422.24 v1@4219.89,3569.89 ; v1@4215.87,3564.87 cw(c4206.17,3555.17) 4219.89,3555.17 ; 4219.89,3390.11 4219.89,3380.11 4221.4,3378.6 U4.4@4264.12,3378.6 ; 4219.89,3394.03 cw(c4230.97,3394.03) v1@4223.13,3401.87 ; 4219.89,3417.97 ccw(c4230.97,3417.97) v1@4223.13,3410.13 ; 4219.89,3554.62 cw(c4234.38,3554.62) v1@4224.13,3564.87 ; 4079.03,3396.03 ccw(c4069.05,3406) 4083.16,3406 cw(c4069.05,3406) 4079.03,3396.03 ; 4079.03,3396.03 cw(c4089,3386.05) 4089,3400.16 ccw(c4089,3386.05) 4079.03,3396.03 ; 4235.42,3378.6 ccw(c4235.42,3397.46) 4248.75,3384.12 cw(c4235.42,3397.46) 4235.42,3378.6 ; 4235.42,3378.6 cw(c4235.42,3359.74) 4248.75,3373.08 ccw(c4235.42,3359.74) 4235.42,3378.6
  Bottom Layer w8: v1@3917,2400 3932,2415 3982,2415 4032,2465 4032,3349 v1(4089,3406) v1(4219,3406) ; v1@3918,2407.84 ccw(c3918,2424.36) 3929.68,2412.68 ; v1@3923.84,2402 cw(c3935.53,2402) 3927.27,2410.27 ; v1@4083.16,3406 cw(c4069.05,3406) 4079.03,3396.03 cw(c4089,3386.05) v1@4089,3400.16 ; v1(4220,3569) 4382,3569 4426,3613 4426,3934.43 J6.2@4476.57,3985 ; v1@4224.13,3564.87 cw(c4234.1,3554.89) 4234.1,3569 cw(c4234.1,3583.11) v1@4224.13,3573.13 ; J6.2@4451.05,3985 cw(c4389.42,3985) 4433,3941.42 cw(c4476.57,3897.84) J6.2@4476.57,3959.47 ; J6.2@4459.05,3985 cw(c4416.73,3985) 4446.65,3955.08 cw(c4476.57,3925.16) J6.2@4476.57,3967.47 ; 4103.1,3406 ccw(c4103.1,3391.89) 4093.13,3401.87 cw(c4103.1,3391.89) 4103.1,3406 ; 4103.1,3406 cw(c4103.1,3420.11) 4093.13,3410.13 ccw(c4103.1,3420.11) 4103.1,3406 ; 4204.9,3406 ccw(c4204.9,3420.11) 4214.87,3410.13 cw(c4204.9,3420.11) 4204.9,3406 ; 4204.9,3406 cw(c4204.9,3391.89) 4214.87,3401.87 ccw(c4204.9,3391.89) 4204.9,3406
VBUS: C12.2 J6.1 U4.5 U5.1 U6.7 U6.8 | length 2964.9
  Top Layer w10: C12.2@3973.68,3516 4008.21,3516 4008.21,3486 ; U6.8@3988.53,3465.72 3988.53,3484.53 3990,3486 4008.21,3486 ; U6.7@4008.21,3465.72 4008.21,3486 ; U4.5@4264.12,3416 4304,3416 4314,3426 v1(4314,3515) ; v1@4310.58,3511.58 cw(c4302.31,3503.31) 4314,3503.31 cw(c4325.69,3503.31) v1@4317.42,3511.58 ; 3985.38,3516 ccw(c3985.38,3504.31) 3977.11,3512.58 cw(c3985.38,3504.31) 3985.38,3516 ; 3985.38,3516 cw(c3985.38,3527.69) 3977.11,3519.42 ccw(c3985.38,3527.69) 3985.38,3516 ; 3997.31,3516 ccw(c3997.31,3527.69) 4005.58,3519.42 cw(c3997.31,3527.69) 3997.31,3516 ; 3997.31,3516 cw(c3997.31,3504.31) 4005.58,3512.58 ccw(c3997.31,3504.31) 3997.31,3516 ; 4290.4,3416 ccw(c4290.4,3399.56) 4278.78,3411.18 cw(c4290.4,3399.56) 4290.4,3416 ; 4290.4,3416 cw(c4290.4,3432.44) 4278.78,3420.82 ccw(c4290.4,3432.44) 4290.4,3416 ; 4008.21,3502.41 cw(c4022.59,3502.41) 4012.42,3512.58 ccw(c4022.59,3502.41) 4008.21,3502.41
  Top Layer w12: U5.1@3878.66,2313.58 v1@3878.66,2403.66 ; 3878.66,2392.49 cw(c3892.51,2392.49) v1@3882.72,2402.28
  Bottom Layer w10: v1(4009,3516) 4313,3516 v1(4314,3515) ; 4299.9,3516 cw(c4299.9,3500.89) v1@4310.58,3511.58 ; 4020.69,3516 ccw(c4020.69,3504.31) 4012.42,3512.58 cw(c4020.69,3504.31) 4020.69,3516 ; 4020.69,3516 cw(c4020.69,3527.69) 4012.42,3519.42 ccw(c4020.69,3527.69) 4020.69,3516
  Bottom Layer w12: v1@3879,2405 3910,2436 3965.39,2436 4012,2482.61 4012,3513 v1(4009,3516) ; v1@3883.84,2405 cw(c3895.53,2405) 3887.27,2413.27 ; v1@4313,3515 v1(4314,3515) 4459,3515 4499,3555 4499,3779 4522,3802 4626,3802 4640,3816 4640,3920 J6.1@4575,3985 ; J6.1@4575,3961.47 cw(c4575,3904.67) 4615.16,3944.84 cw(c4655.33,3985) J6.1@4598.53,3985
  other v1: 3880,2405
pads on no net: U4.1 U4.6 U5.0 U5.4 U6.1 U6.9 U6.10 U6.11 U6.12 U6.13 U6.14 U6.15 U6.17 U6.18 U6.19 U6.22 U6.23 U6.24 U7.1 U7.2 U7.3 U7.13 U7.14 U7.15 U7.17 U7.18 U7.19 U7.20 U7.21 U7.22 U7.23 U7.24 U7.37 U7.38 U7.43 U7.44 U7.45 U7.48 U7.51 U7.52 U7.53 U7.54 U7.55 U7.56 U7.57 U7.58 U7.59 U7.60 U7.62 U7.69 U7.70 U7.71 U7.72 U7.73 U7.74 U7.75 U7.76 U7.77 U7.78 U7.79 U7.80 U7.81 U7.82 U7.83 U7.84 U8.1@5060.24,3650.98 U8.2 U8.3 U8.4 U8.5 U8.6 U8.7 U8.14 U8.15 U8.16 U8.17 U8.19 U8.21 U8.22

## Polygon pours and split planes (outlines as drawn)
GND on Top Layer "Bottom Layer-No Net" (solid, remove dead copper, pour order 1000): 1820,4199 5719,4199 5719,2100 1820,2100 1820,4199
GND on Bottom Layer "Bottom Layer-No Net" (solid, remove dead copper, pour order 1001): 1821,4199 5719,4199 5719,2101 1821,2101 1821,4199

## Keep-outs
Keep-Out Layer:
  the board outline again, w5

## Other copper
Top Layer:
  rectangle net 12V: 2205,2318 2254,2575
  rectangle net 12V: 2205,2905 2254,3149
  rectangle net 12V: 2205,3466 2254,3576
  rectangle net 12V: 2367,3663 2770,3741
  rectangle net GND: 3731,2154 3829,2203
  rectangle net GND: 4019,2155 4104,2203
  rectangle net GND: 4029,2291 4113,2338
  rectangle net GND: 3742,2287 3815,2339
  rectangle net GND: 4776,3802 4846,3947
  rectangle net GND: 4206,3819 4277,3956
  rectangle net GND: 2074,3007 2122,3104
  rectangle net GND: 2077,2429 2125,2520
  rectangle net GND: 2074,3574 2125,3667
  rectangle net GND: 5135,3329 5157,3363
  rectangle net GND: 2250,3896 2415,4019
  rectangle net GND: 2454,3758 2565,3872
Bottom Layer:
  rectangle net 12V: 2205,3663 2445,3741
  rectangle net 12V: 2155,2353 2254,3741
  rectangle net GND: 4190,3818 4364,3894
  rectangle net GND: 4699,3825 4871,3891
  rectangle net GND: 3744,2328 3811,2379
  rectangle net GND: 3744,2192 3811,2242
  rectangle net GND: 4025,2192 4093,2243
  rectangle net GND: 4026,2328 4094,2378
  rectangle net GND: 2265,3900 2413,4016
  rectangle net GND: 2454,3753 2577,3874

## Silkscreen, mask and mechanical layers (free items; w line width, h text height)
Top Overlay:
  lines w5: 3564,3349 3564,3863 3758,3863 3758,3349 3564,3349
  text "V1.1" at 1942,3918 h60 r90
  text "J2/J3/J4:" at 3563,3878 h60
  text "GND" at 3581,3787.67 h60
  text "A" at 3581,3702.33 h60
  text "VCC" at 3581,3617 h60
  text "B" at 3581,3531.67 h60
  text "M+" at 3581,3446.33 h60
  text "M-" at 3581,3361 h60
  text "MPU6050" at 4944,3266 h60
  text "CP2104" at 3783,3166 h60
  text "Based On Arcuino Due" at 3527,2947 h60
  text "https://github.com/open-robot" at 3530,2847 h60
  text "http://www.ros-robot.com/" at 3529,2747 h60

## Text inside footprints (layer, text, board x,y; h text height)
U7: Top Overlay "CANTX" at 5435,2275 h30 r90; Top Overlay "CANRX" at 5335,2280 h30 r90; Top Overlay "DAC1" at 5235,2280 h30 r90; Top Overlay "DAC0" at 5135,2280 h30 r90; Top Overlay "A11" at 5035,2280 h30 r90; Top Overlay "A10" at 4935,2280 h30 r90; Top Overlay "A9" at 4835,2280 h30 r90; Top Overlay "A8" at 4735,2280 h30 r90; Top Overlay "A7" at 4535,2280 h30 r90; Top Overlay "A6" at 4435,2280 h30 r90; Top Overlay "A5" at 4335,2280 h30 r90; Top Overlay "A4" at 4235,2280 h30 r90; Top Overlay "SCL 21" at 5235,3845 h30 r90; Top Overlay "SDA 20" at 5135,3840 h30 r90; Top Overlay "RX1 19" at 5035,3845 h30 r90; Top Overlay "TX1 18" at 4935,3845 h30 r90; Top Overlay "13" at 2975,3980 h30 r90; Top Overlay "12" at 3075,3980 h30 r90; Top Overlay "11" at 3170,3980 h30 r90; Top Overlay "10" at 3270,3980 h30 r90; Top Overlay "9" at 3370,3990 h30 r90; Top Overlay "8" at 3475,3990 h30 r90; Top Overlay "7" at 3635,3990 h30 r90; Top Overlay "6" at 3735,3990 h30 r90; Top Overlay "5" at 3835,3990 h30 r90; Top Overlay "4" at 3935,3990 h30 r90; Top Overlay "3" at 4035,3990 h30 r90; Top Overlay "2" at 4135,3990 h30 r90; Top Overlay "GND" at 2875,3945 h30 r90; Top Overlay "AREF" at 2780,3920 h30 r90; Top Overlay "5V" at 5500,4160 h30; Top Overlay "5V" at 5595,4160 h30; Top Overlay "22" at 5375,3985 h30; Top Overlay "24" at 5375,3885 h30; Top Overlay "26" at 5370,3785 h30; Top Overlay "28" at 5370,3685 h30; Top Overlay "30" at 5370,3585 h30; Top Overlay "32" at 5370,3485 h30; Top Overlay "34" at 5370,3385 h30; Top Overlay "36" at 5370,3285 h30; Top Overlay "38" at 5370,3185 h30; Top Overlay "40" at 5370,3085 h30; Top Overlay "42" at 5370,2985 h30; Top Overlay "44" at 5370,2885 h30; Top Overlay "46" at 5370,2785 h30; Top Overlay "48" at 5370,2685 h30; Top Overlay "50" at 5365,2585 h30; Top Overlay "52" at 5370,2485 h30; Top Overlay "GND" at 5530,2295 h30; Top Overlay "NC" at 2965,2280 h30 r90; Top Overlay "IOREF" at 3035,2280 h30 r90; Top Overlay "3.3V" at 3235,2280 h30 r90; Top Overlay "5V" at 3335,2280 h30 r90; Top Overlay "GND" at 3435,2280 h30 r90; Top Overlay "GND" at 3535,2280 h30 r90; Top Overlay "Vin" at 3635,2280 h30 r90; Top Overlay "RESET" at 3135,2280 h30 r90